# Altium PCB PCB-EtchingTester V2.PcbDoc
Units mil, origin at the board's own origin, x right, y up, seen from the top; angles counter-clockwise.
Board outline 1500 x 1000 mil, 2 copper layers (Top Layer, Bottom Layer); 2 components, 11 nets, 71 pads, 0 vias.
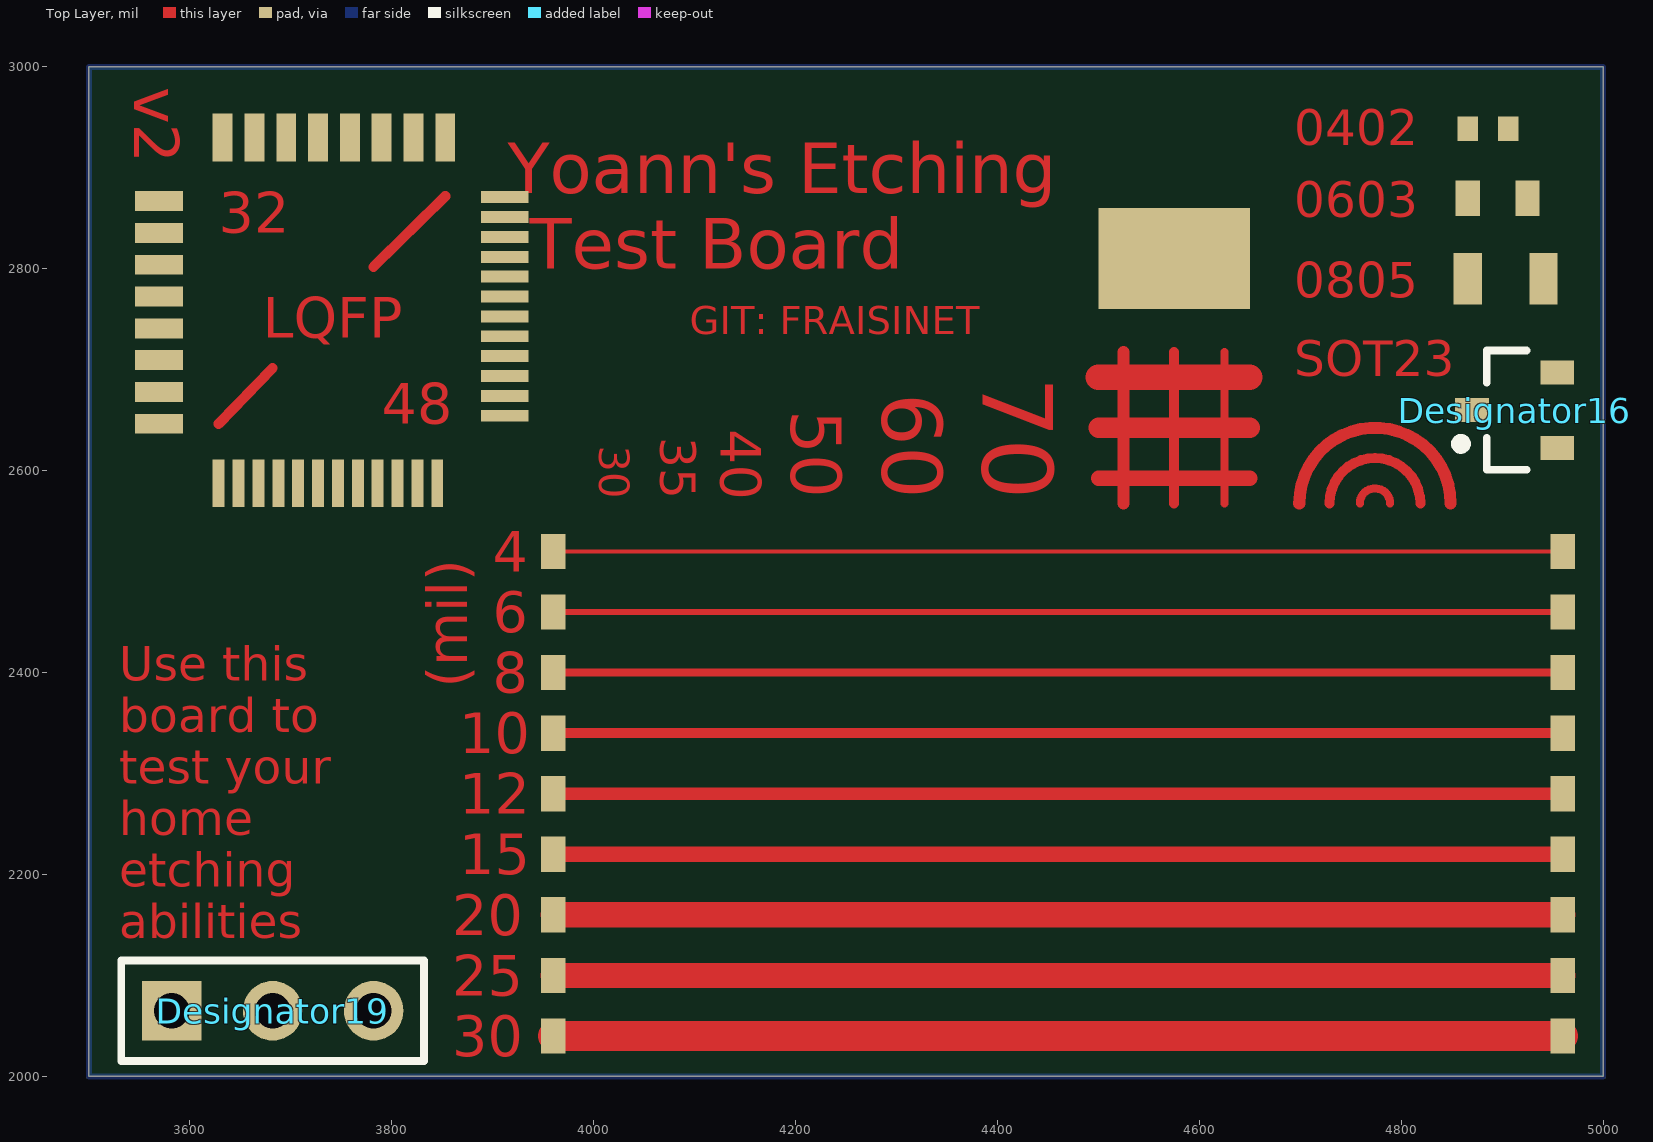
[diagram p0: Top Layer view]
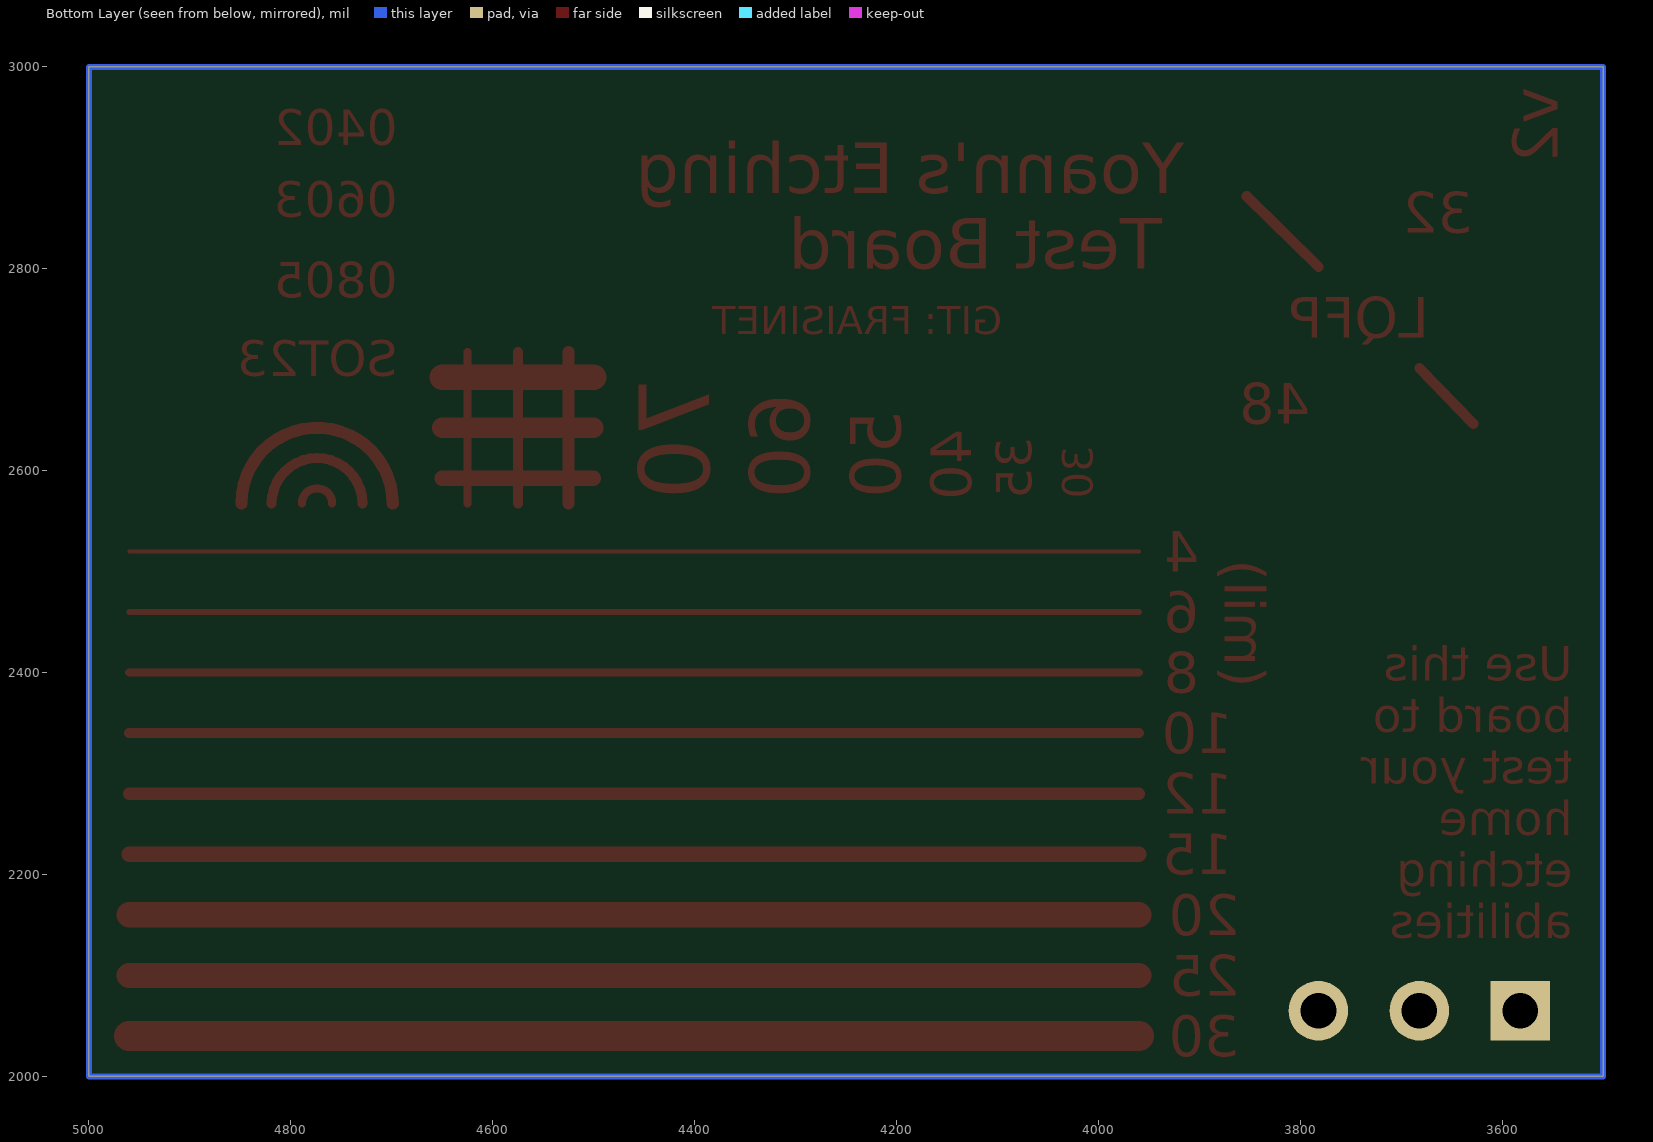
[diagram p1: Bottom Layer view, seen from below]

## Layer stack, top to bottom
Top Solder: solder mask 0.4, Solder Resist, Dk 3.5
Top Layer: signal copper 1.4
Dielectric 1: dielectric 12.6, FR-4, Dk 4.8
Bottom Layer: signal copper 1.4
Bottom Solder: solder mask 0.4, Solder Resist, Dk 3.5

## Board outline
3500,3000 3500,2000 5000,2000 5000,3000

## Design rules (kind name [scope] priority, off if disabled: settings)
Clearance [All] p1: gap=8 ignorepadtopadclearanceinfootprint=FALSE except(0: Arc-Text Track-Text; 5: SMDPad-SMDPad; 10: THPad-THPad)
PolygonConnect [All] p1: connectstyle=Relief reliefconductorwidth=10 reliefentries=4 polygonreliefangle="90 Angle" airgapwidth=10
RoutingVias [All] p1: holewidth=28 width=50 viastyle="Through Hole" minholewidth=28 minwidth=50 maxholewidth=28 maxwidth=50
SolderMaskExpansion [All] p1: expansion=4
Width [All] p1: maxlimit=50 minlimit=4 preferedwidth=8
30 further rules are at their usual default settings.

## Components (designator, comment, footprint, x,y, rotation, side; value= is the part's Value field where it differs from the comment)
Designator16 "Comment" SOT23_L 4912.32,2660 r180 top
Designator19 "Comment" HDR1X3 3582.05,2065 r0 top

## Footprints (in the part's own frame and the unit in brackets; to place one, negate y for a bottom-side part, rotate by r counter-clockwise, add the part's x,y. Pads: shape width x height; smd on the part's side, far side on the other; paste and mask are expansions set on the pad)
HDR1X3 [mm] "Connector; Header; 3 Position"
  rect 1.5x1.5 hole 0.9: 1(0,0)
  round 1.5 hole 0.9: 2(2.54,0) 3(5.08,0)
  silkscreen extent -1.27,-1.27 6.35,1.27
SOT23_L [mm] "SOT23, 3-Leads, Body 2.9x1.3mm, Pitch 0.95mm, Lead Span 2.3mm - Reverse Pinning, IPC High Density"
  rect 0.85x0.6 smd: 1(1.075,0) 2(-1.075,-0.95) 3(-1.075,0.95)
  silkscreen extent -0.3,-1.5 1.47,1.5, body extent -0.7,-1.5 0.7,1.5, height 1.1

## Free pads (board coordinates)
  rect 19.68x47.24 smd: 4(3632.52,2930) 5(3664.02,2930) 6(3695.51,2930) 7(3727.01,2930) 8(3758.5,2930) 9(3790,2930) 10(3821.5,2930) 11(3852.99,2930)
  rect 47.24x19.68 smd: 12(3569.53,2867.01) 13(3569.53,2835.51) 14(3569.53,2804.02) 15(3569.53,2772.52) 16(3569.53,2741.02) 17(3569.53,2709.53) 18(3569.53,2678.03) 19(3569.53,2646.54)
  rect 47.24x11.81 smd: 20(3912.05,2870.94) 40(3912.05,2851.26) 41(3912.05,2831.57) 42(3912.05,2811.89) 43(3912.05,2792.2) 44(3912.05,2772.52) 45(3912.05,2752.83) 46(3912.05,2733.15) 47(3912.05,2713.46) 48(3912.05,2693.78) 49(3912.05,2674.09) 50(3912.05,2654.41)
  rect 11.81x47.24 smd: 21(3628.58,2587.48) 28(3648.27,2587.48) 29(3667.95,2587.48) 30(3687.64,2587.48) 31(3707.32,2587.48) 32(3727.01,2587.48) 33(3746.69,2587.48) 34(3766.38,2587.48) 35(3786.06,2587.48) 36(3805.75,2587.48) 37(3825.43,2587.48) 38(3845.12,2587.48)
  rect 24x35 smd: 51(4866,2870) 52(4925,2870) ""(3960,2040) ""(3960,2100) ""(3960,2160) ""(3960,2220) ""(3960,2280) ""(3960,2340) ""(3960,2400) ""(3960,2460) ""(3960,2520) ""(4960,2040) ""(4960,2100) ""(4960,2160) ""(4960,2220) ""(4960,2280) ""(4960,2340) ""(4960,2400) ""(4960,2460) ""(4960,2520)
  rect 20x24 smd: 53(4906,2938.74) 54(4866,2938.74)
  rect 28x51 smd: 56(4866,2790) 57(4941,2790)
  rect 150x100 smd: ""(4575,2810)

## Nets (pads, with @x,y where several pads share a name; then routed paths per layer and width w, separated by ;. In a path a pad name is that pad's centre, name@x,y a point inside that pad or via, vN(x,y) a via of type N, cw(c..) or ccw(c..) an arc to the next point about the centre after c; other vN are vias at no path point)
4mil: pad.@3960,2520 pad.@4960,2520 | length 1000
  Top Layer w4: pad.@3960,2520 pad.@4960,2520
6mil: pad.@3960,2460 pad.@4960,2460 | length 1000
  Top Layer w6: pad.@3960,2460 pad.@4960,2460
8mil: pad.@3960,2400 pad.@4960,2400 | length 1000
  Top Layer w8: pad.@3960,2400 pad.@4960,2400
10mil: pad.@3960,2340 pad.@4960,2340 | length 1000
  Top Layer w10: pad.@3960,2340 pad.@4960,2340
12mil: pad.@3960,2280 pad.@4960,2280 | length 1000
  Top Layer w12: pad.@3960,2280 pad.@4960,2280
15mil: pad.@3960,2220 pad.@4960,2220 | length 1000
  Top Layer w15: pad.@3960,2220 pad.@4960,2220
20mil: pad.@3960,2160 pad.@4960,2160 | length 1000
  Top Layer w25: pad.@3960,2160 pad.@4960,2160
25mil: pad.@3960,2100 pad.@4960,2100 | length 1000
  Top Layer w25: pad.@3960,2100 pad.@4960,2100
30mil: pad.@3960,2040 pad.@4960,2040 | length 1000
  Top Layer w30: pad.@3960,2040 pad.@4960,2040
Border:  | length 5000
  Bottom Layer w6: 3500,2000 5000,2000 5000,3000 3500,3000 3500,2000
Matrix:  | length 900
  Top Layer w8: 4625,2567.52 4625,2717.52
  Top Layer w10: 4575,2567.52 4575,2717.52
  Top Layer w12: 4525,2567.52 4525,2717.52
  Top Layer w15: 4500,2592.52 4650,2592.52
  Top Layer w20: 4500,2642.52 4650,2642.52
  Top Layer w25: 4500,2692.52 4650,2692.52
pads on no net: Designator16.1 Designator16.2 Designator16.3 Designator19.1 Designator19.2 Designator19.3
copper on no net: | length 600.7
  Top Layer w8: 4759,2567.52 cw(c4774,2567.52) 4789,2567.52
  Top Layer w10: 3628.58,2646.54 3682.05,2701.89 ; 3782.05,2801.89 3852.99,2871.89 ; 4729,2567.52 cw(c4774,2567.52) 4819,2567.52
  Top Layer w12: 4699,2567.52 cw(c4774,2567.52) 4849,2567.52

## Other copper
Top Layer:
  text "v2" at 3545,2980 h45 r270
  text "0402" at 4694,2922.4 h35
  text "0603" at 4694,2851.26 h35
  text "32" at 3628.58,2835.51 h40
  text "Yoann's Etching /  Test Board" at 3915,2800 h50
  text "0805" at 4694,2771.26 h35
  text "GIT: FRAISINET" at 4095,2735 h28
  text "LQFP" at 3672.05,2731.89 h40
  text "70" at 4385.71,2693.23 h70 r270
  text "SOT23" at 4694,2693.35 h35
  text "60" at 4285.75,2676.57 h60 r270
  text "50" at 4195.79,2659.91 h50 r270
  text "48" at 3790,2646.54 h40
  text "40" at 4125.79,2641.24 h40 r270
  text "35" at 4065.79,2632.91 h35 r270
  text "30" at 4005.79,2624.58 h30 r270
  text "4" at 3899.99,2500 h40
  text "6" at 3899.99,2440 h40
  text "(mil)" at 3875,2385 h40 r90
  text "8" at 3899.99,2380 h40
  text "10" at 3866.66,2320 h40
  text "12" at 3866.66,2260 h40
  text "15" at 3866.66,2200 h40
  text "20" at 3860,2140 h40
  text "Use this / board to / test your / home / etching / abilities" at 3530,2137 h34
  text "25" at 3860,2080 h40
  text "30" at 3860,2020 h40